# EAGLE board 可控硅控制 (EAGLE 6.3)
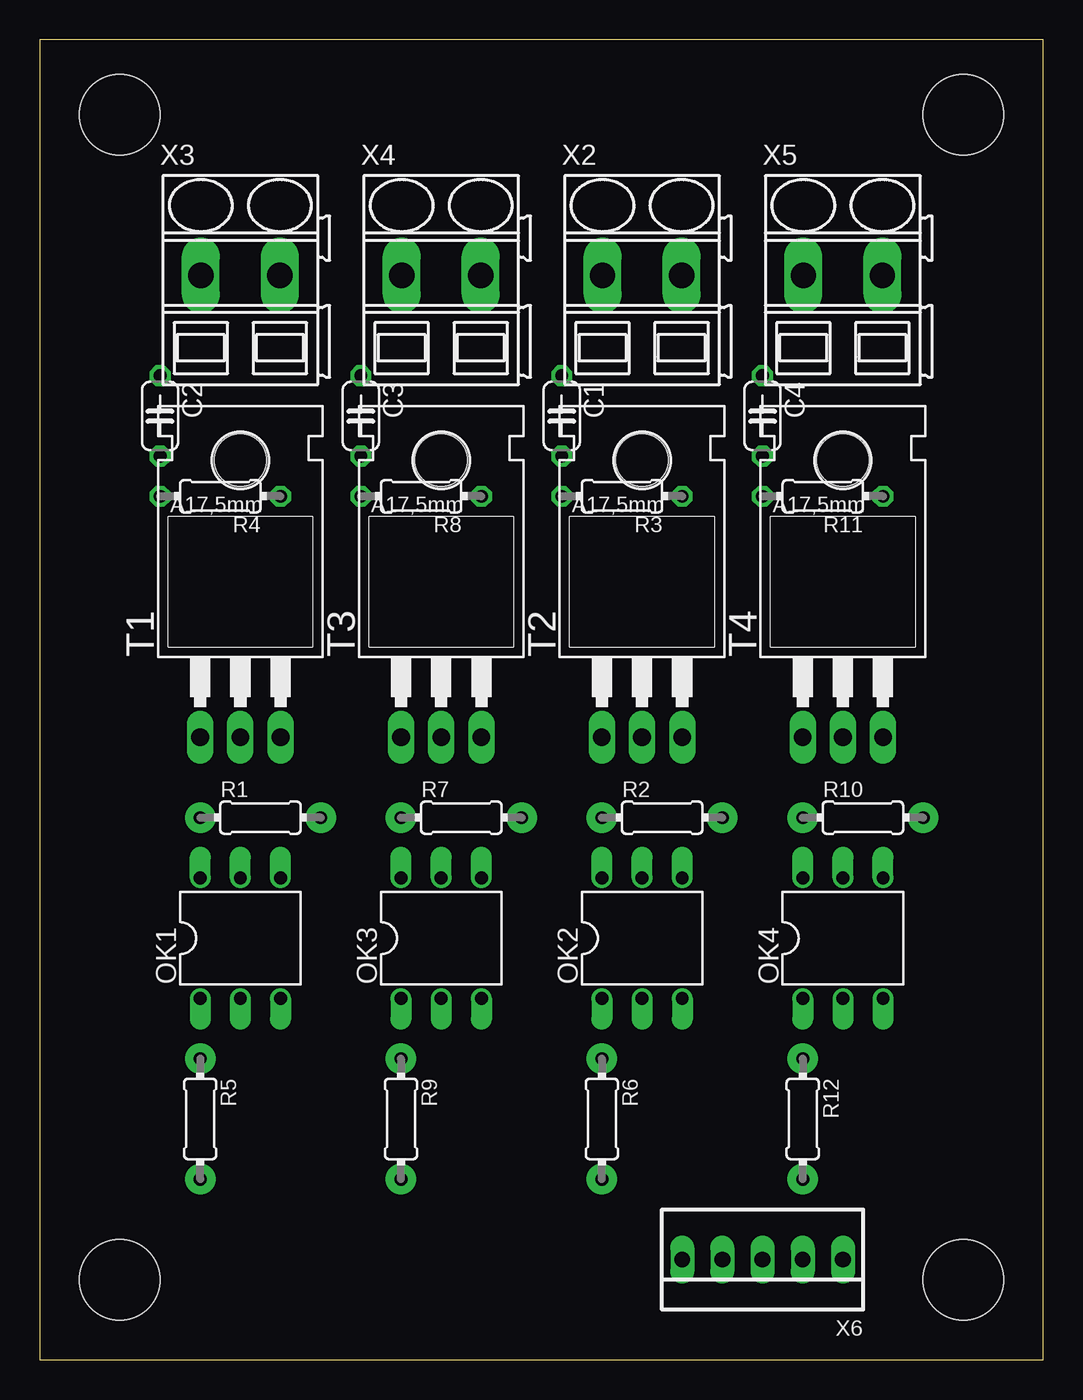
[diagram p0: board, top side]
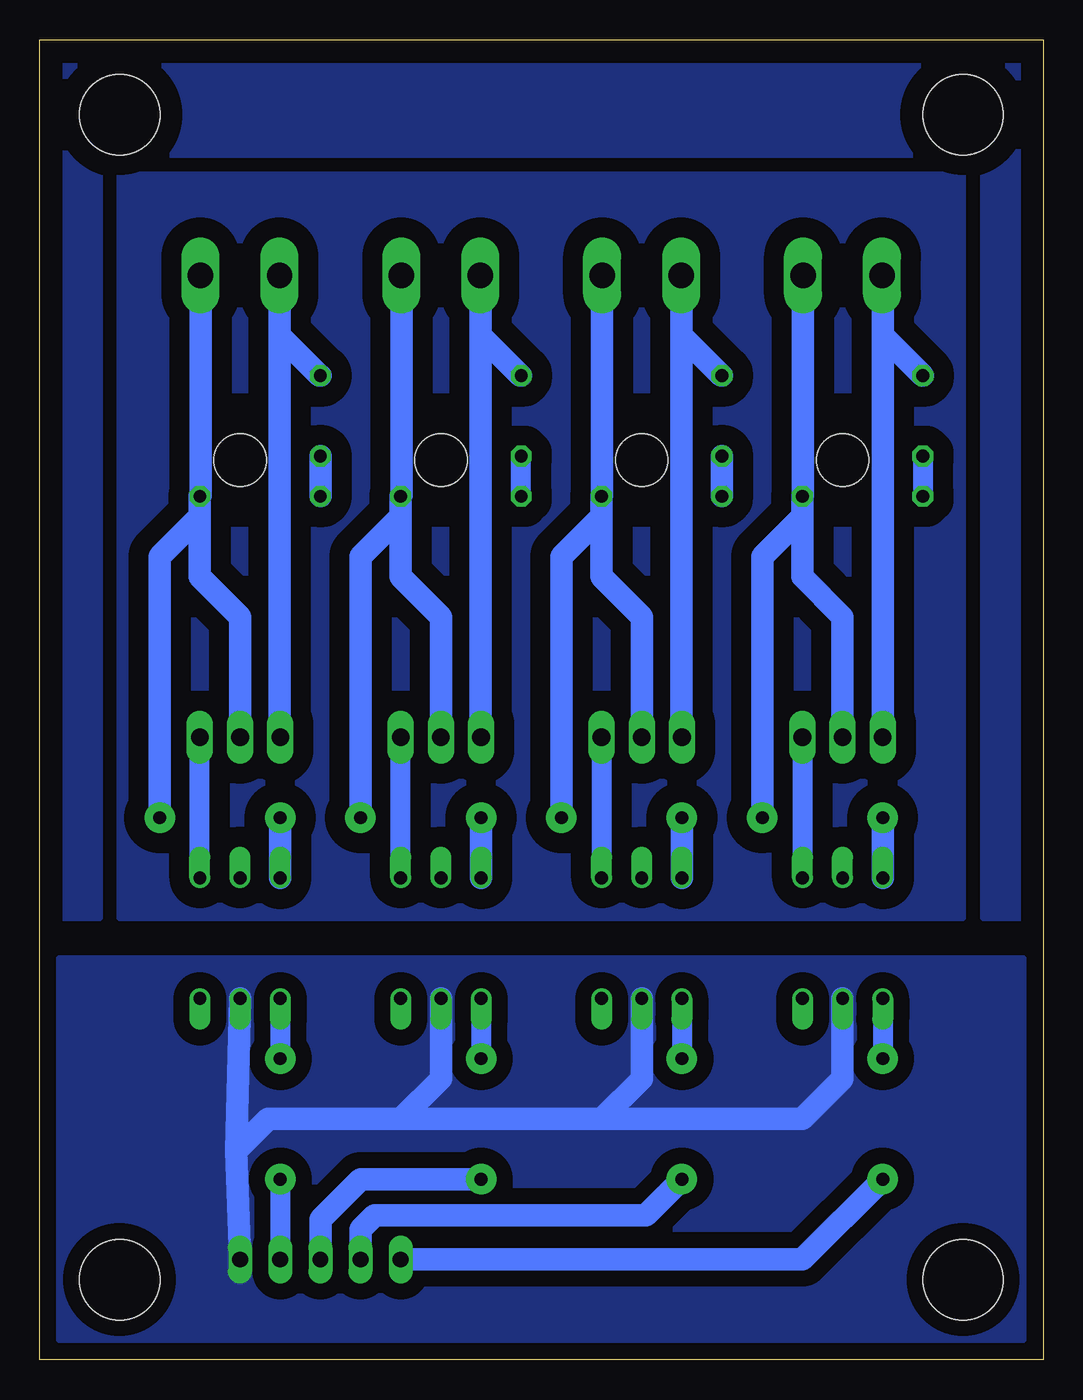
[diagram p1: board, bottom side, seen from below]

Size 63.48 x 83.49 mm. Coordinates in mm from the lower left corner, seen from the top.
Outline: 0,0 63.48,0 63.48,83.49 0,83.49 0,0
Copper layers (1*16): Top 0.035mm / dielectric 1.5mm / Bottom 0.035mm
Design rules "default": minimum track width 10mil, minimum drill 24mil, track to track 8mil, track to pad 8mil, pad to pad 8mil, via to via 8mil, smd to smd 8mil, copper to edge 40mil, drill to drill 8mil, minimum pad ring 10mil, minimum via ring 8mil, stop-mask expansion 4mil, vias tented up to drill 0mil, thermal gap 10mil
Holes 5.08 mm at 5.08,78.74 58.42,78.74 58.42,5.08 5.08,5.08

## Footprints (pad centres in the part's own frame; a part is rotated, then mirrored left to right if it is on the bottom)
C050-024X044 = drill 0.813 octagon: 1 -2.54,0; 2 2.54,0
DIL06 = drill 0.813 offset: 1 -2.54,-3.81; 2 0,-3.81; 3 2.54,-3.81; 4 2.54,3.81; 5 0,3.81; 6 -2.54,3.81
0204/7 = drill 0.813 octagon: 1 -3.81,0; 2 3.81,0
TO220AB = drill 1.118 long: 1 -2.54,-6.35; 2 0,-6.35; 3 2.54,-6.35 | hole 3.302: 0,11.176
SMKDSP_1,5/2 = drill 1.6 pad 1.8 long: 1 -2.5,0; 2 2.5,0
22-23-2051 = drill 1 long: 1 -5.08,0; 2 -2.54,0; 3 0,0; 4 2.54,0; 5 5.08,0

## Placement (x,y rotation side)
C1  0.01u  [C050-024X044]  33.02,59.69 270 top
C2  0.01u  [C050-024X044]  7.62,59.69 270 top
C3  0.01u  [C050-024X044]  20.32,59.69 270 top
C4  0.01u  [C050-024X044]  45.72,59.69 270 top
OK1  MOC3041M  [DIL06]  12.7,26.67 0 top
OK2  MOC3041M  [DIL06]  38.1,26.67 0 top
OK3  MOC3041M  [DIL06]  25.4,26.67 0 top
OK4  MOC3041M  [DIL06]  50.8,26.67 0 top
R1  2K/330  [0204/7]  13.97,34.29 0 top
R2  2K/330  [0204/7]  39.37,34.29 0 top
R3  100  [0204/7]  36.83,54.61 180 top
R4  100  [0204/7]  11.43,54.61 180 top
R5  47  [0204/7]  10.16,15.24 270 top
R6  47  [0204/7]  35.56,15.24 270 top
R7  2K/330  [0204/7]  26.67,34.29 0 top
R8  100  [0204/7]  24.13,54.61 180 top
R9  47  [0204/7]  22.86,15.24 270 top
R10  2K/330  [0204/7]  52.07,34.29 0 top
R11  100  [0204/7]  49.53,54.61 180 top
R12  47  [0204/7]  48.26,15.24 270 top
T1  BT136  [TO220AB]  12.7,45.72 0 top
T2  BT136  [TO220AB]  38.1,45.72 0 top
T3  BT136  [TO220AB]  25.4,45.72 0 top
T4  BT136  [TO220AB]  50.8,45.72 0 top
X2  SMKDSP_1,5/2  [SMKDSP_1,5/2]  38.1,68.58 0 top
X3  SMKDSP_1,5/2  [SMKDSP_1,5/2]  12.7,68.58 0 top
X4  SMKDSP_1,5/2  [SMKDSP_1,5/2]  25.4,68.58 0 top
X5  SMKDSP_1,5/2  [SMKDSP_1,5/2]  50.8,68.58 0 top
X6  22-23-2051  [22-23-2051]  45.72,6.35 180 top

## Library data of the parts
C1-C4 R1-R12 = resistor
OK1-OK4 = optocoupler; MF: FAIRCHILD SEMICONDUCTOR; MPN: MOC3041M; OC_FARNELL: 1086677; OC_NEWARK: 78K6090
T1-T4 = triac
X2-X5 = con-phoenix-smkdsp; MF: FARNELL; MPN: 1733570; OC_FARNELL: 3041244; OC_NEWARK: 69C8588
X6 = con-molex; MF: MOLEX; MPN: 22-23-2051; OC_FARNELL: 1462952; OC_NEWARK: 38C9178

## Nets
11: OK1.1 R5.1
22: OK3.1 R9.1
33: OK4.1 R12.1
44: OK2.1 R6.1
A1: R1.2 R4.1 T1.2 X3.2
A2: C2.1 T1.1 X3.1
B1: R7.2 R8.1 T3.2 X4.2
B2: C3.1 T3.1 X4.1
C1: R2.2 R3.1 T2.2 X2.2
C2: C1.1 T2.1 X2.1
D1: R10.2 R11.1 T4.2 X5.2
D2: C4.1 T4.1 X5.1
GND: OK1.2 OK2.2 OK3.2 OK4.2 X6.1
N$1: OK1.6 R1.1
N$2: OK1.4 T1.3
N$3: C2.2 R4.2
N$4: OK2.6 R2.1
N$5: OK2.4 T2.3
N$7: C1.2 R3.2
N$8: OK3.6 R7.1
N$9: OK3.4 T3.3
N$12: C3.2 R8.2
N$13: OK4.6 R10.1
N$14: OK4.4 T4.3
N$16: C4.2 R11.2
P1: R5.2 X6.5
P2: R9.2 X6.4
P3: R6.2 X6.3
P4: R12.2 X6.2

## Tracks (layer width: path | path; a pad name or v marks a point on that pad's centre or on a via)
11
  Bottom 1.27: OK1.1 R5.1
22
  Bottom 1.27: OK3.1 R9.1
33
  Bottom 1.27: OK4.1 R12.1
44
  Bottom 1.27: OK2.1 R6.1
A1
  Bottom 1.422: X3.2 15.2,54.65 R4.1 15.24,53.34 | 15.24,53.34 15.24,49.53 12.7,46.99 T1.2 | R1.2 17.78,50.8 15.24,53.34
A2
  Bottom 1.422: T1.1 10.16,64.77 | 10.16,64.77 10.16,68.54 X3.1 | C2.1 10.16,64.77
B1
  Bottom 1.422: X4.2 27.9,54.65 R8.1 27.94,53.34 | 27.94,53.34 27.94,49.53 25.4,46.99 T3.2 | R7.2 30.48,50.8 27.94,53.34
B2
  Bottom 0.406: T3.1 22.9,39.41
  Bottom 1.422: 22.9,39.41 22.9,64.77 | 22.9,64.77 X4.1 | C3.1 20.36,62.23 22.9,64.77
C1
  Bottom 1.422: X2.2 40.6,54.65 R3.1 40.64,53.34 | 40.64,53.34 40.64,49.53 38.1,46.99 T2.2 | R2.2 43.18,50.8 40.64,53.34
C2
  Bottom 0.406: T2.1 35.6,39.41
  Bottom 1.422: 35.6,39.41 35.6,64.77 | 35.6,64.77 X2.1 | C1.1 33.06,62.23 35.6,64.77
D1
  Bottom 1.422: X5.2 53.3,54.65 R11.1 53.34,53.34 | 53.34,53.34 53.34,49.53 50.8,46.99 T4.2 | R10.2 55.88,50.8 53.34,53.34
D2
  Bottom 0.406: T4.1 48.3,39.41
  Bottom 1.422: 48.3,39.41 48.3,64.77 | 48.3,64.77 X5.1 | C4.1 45.76,62.23 48.3,64.77
GND
  Bottom 1.422: OK1.2 12.7,17.78 15.24,15.24 27.94,15.24 | OK3.2 25.4,17.78 27.94,15.24 | OK2.2 38.1,17.78 40.64,15.24 | 40.64,15.24 27.94,15.24 | 40.64,15.24 49.02,15.24 51.05,13.21 | OK4.2 51.05,13.21 | 51.05,13.21 X6.1
  pour Bottom (isolate 1.016, no thermals): 1.27,1.27 1.27,25.4 62.23,25.4 62.23,1.27
N$1
  Bottom 1.422: OK1.6 R1.1
N$2
  Bottom 1.27: T1.3 OK1.4
N$3
  Bottom 1.27: C2.2 R4.2
N$4
  Bottom 1.422: OK2.6 R2.1
N$5
  Bottom 1.27: OK2.4 T2.3
N$6
  pour Bottom (isolate 1.27, no thermals): 58.42,74.93 5.08,74.93 5.08,27.94 58.42,27.94
N$7
  Bottom 1.27: R3.2 C1.2
N$8
  Bottom 1.422: OK3.6 R7.1
N$9
  Bottom 1.27: T3.3 OK3.4
N$11
  pour Bottom (isolate 1.422): 3.81,27.94 3.81,76.2 59.69,76.2 59.69,27.94 62.23,27.94 62.23,82.55 1.27,82.55 1.27,27.94
N$12
  Bottom 1.422: R8.2 C3.2
N$13
  Bottom 1.422: OK4.6 R10.1
N$14
  Bottom 1.27: OK4.4 T4.3
N$16
  Bottom 1.422: R11.2 C4.2
N$18  (via drill 0.8 pad 1.93)
  other vias: 48.26,34.29
N$19  (via drill 0.8 pad 1.93)
  other vias: 55.88,34.29
N$28  (via drill 0.8 pad 1.93)
  other vias: 35.56,34.29
N$30  (via drill 0.8 pad 1.93)
  other vias: 48.26,19.05
N$34  (via drill 0.8 pad 1.93)
  other vias: 43.18,34.29
N$35  (via drill 0.8 pad 1.93)
  other vias: 30.48,34.29
N$36  (via drill 0.8 pad 1.93)
  other vias: 22.86,34.29
N$37  (via drill 0.8 pad 1.93)
  other vias: 10.16,34.29
N$38  (via drill 0.8 pad 1.93)
  other vias: 17.78,34.29
N$42  (via drill 0.8 pad 1.93)
  other vias: 10.16,19.05
N$43  (via drill 0.8 pad 1.93)
  other vias: 22.86,19.05
N$44  (via drill 0.8 pad 1.93)
  other vias: 35.56,19.05
N$45  (via drill 0.8 pad 1.93)
  other vias: 22.86,11.43
N$46  (via drill 0.8 pad 1.93)
  other vias: 10.16,11.43
N$47  (via drill 0.8 pad 1.93)
  other vias: 35.56,11.43
N$48  (via drill 0.8 pad 1.93)
  other vias: 48.26,11.43
P1
  Bottom 1.422: X6.5 15.24,6.35 R5.2
P2
  Bottom 1.422: X6.4 43.18,8.26 42.29,9.14 25.15,9.14 R9.2
P3
  Bottom 1.422: X6.3 45.72,8.89 43.18,11.43 R6.2
P4
  Bottom 1.27: R12.2 X6.2